# Altium PCB 基于单片机的光控计数器的设计.PcbDoc
Units mil, origin at the board's own origin, x right, y up, seen from the top; angles counter-clockwise.
Board outline 6000 x 4000 mil, 2 copper layers (Top Layer, Bottom Layer); 26 components, 28 nets, 134 pads, 0 vias.
Unrouted connection lines stored in the file: 71.
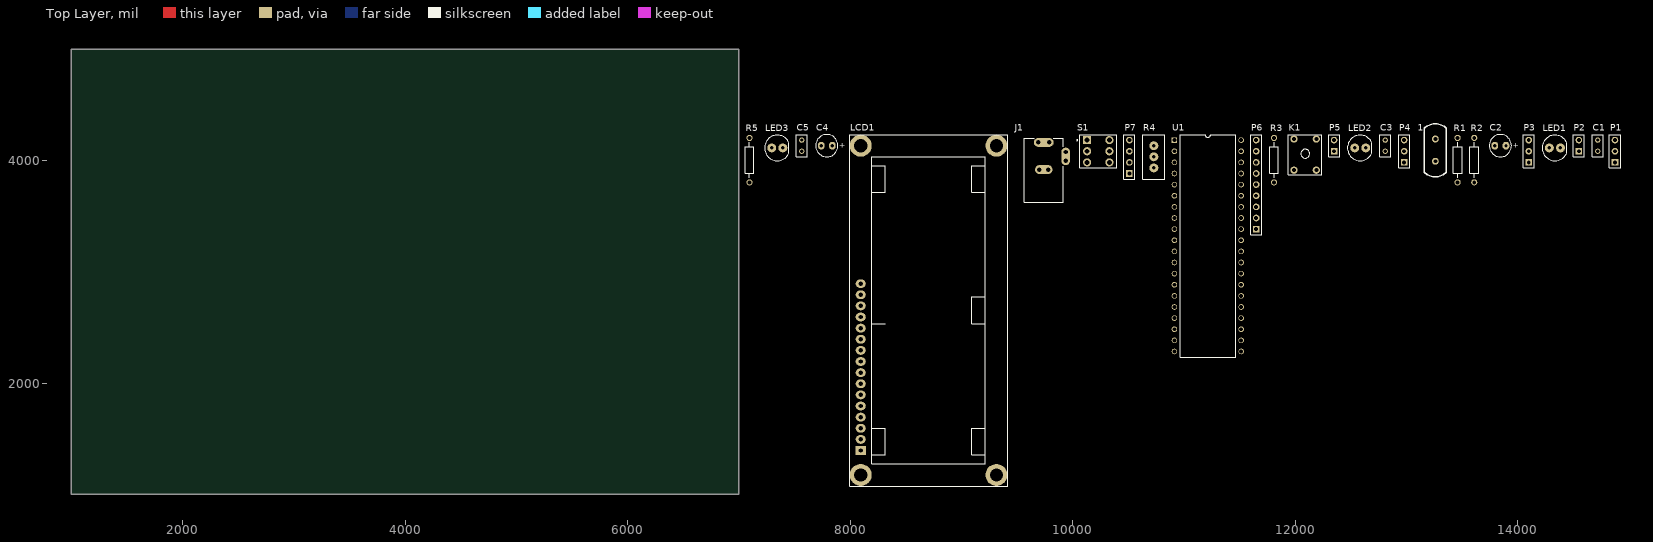
[diagram p0: Top Layer view]
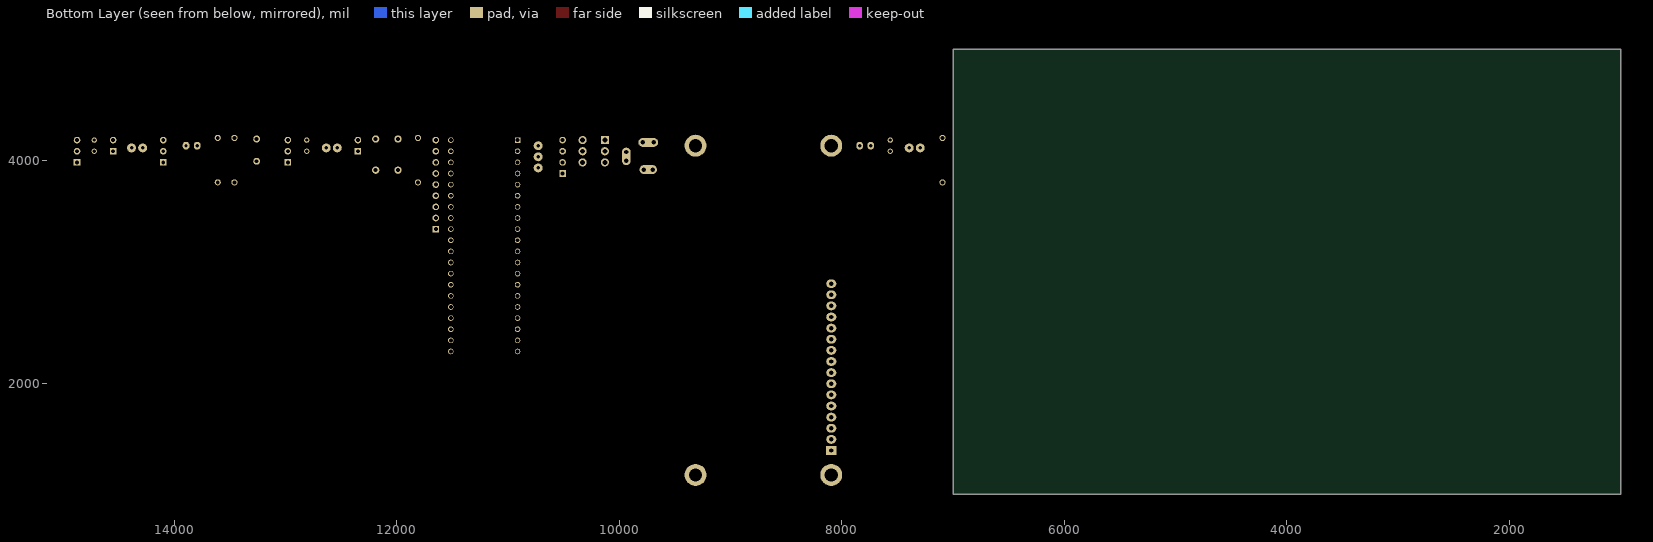
[diagram p1: Bottom Layer view, seen from below]

## Layer stack, top to bottom
Top Layer: signal copper 1.4
Dielectric: dielectric 12.6, FR-4, Dk 4.8
Bottom Layer: signal copper 1.4

## Board outline
1000,1000 7000,1000 7000,5000 1000,5000

## Design rules (kind name [scope] priority, off if disabled: settings)
Clearance [All] p1: gap=10
PolygonConnect [All] p1: connectstyle=Relief reliefconductorwidth=10 reliefentries=4 polygonreliefangle="90 Angle" airgapwidth=10
RoutingVias [All] p1: holewidth=28 width=50 viastyle="Through Hole" minholewidth=28 minwidth=50 maxholewidth=28 maxwidth=50
SolderMaskExpansion [All] p1: expansion=4
Width [All] p1: maxlimit=10 minlimit=10 preferedwidth=10
28 further rules are at their usual default settings.

## Components (designator, comment, footprint, x,y, rotation, side; value= is the part's Value field where it differs from the comment)
1 "XTAL" XTAL 13260,4095 r90 top
C1 "Cap" RAD-0.1 14720,4135 r90 top
C2 "Cap Pol1" RB.1/.2 13845,4135 r0 top
C3 "Cap" RAD-0.1 12810,4135 r90 top
C4 "Cap Pol1" RB.1/.2 7790,4135 r0 top
C5 "Cap" RAD-0.1 7565,4135 r90 top
J1 "PWR2.5" KLD-0202 9740,3625 r90 top
K1 "四脚按键" 四脚按键 11990,4195 r0 top
LCD1 "LCD1602" LCD1602 8095,1395 r90 top
LED1 "LED" LED 14285,4115 r0 top
LED2 "LED" LED 12535,4115 r0 top
LED3 "LED" LED 7295,4115 r0 top
P1 "接收管1" HDR1X3 14875,3985 r90 top
P2 "发射管1" HDR1X2 14550,4085 r90 top
P3 "蜂鸣器" HDR1X3 14100,3985 r90 top
P4 "接收管2" HDR1X3 12980,3985 r90 top
P5 "发射管2" HDR1X2 12350,4085 r90 top
P6 "排阻" HDR1X9 11650,3385 r90 top
P7 "Header 4" HDR1X4 10510,3885 r90 top
R1 "Res2" AXIAL-0.4 13460,4005 r90 top
R2 "Res2" AXIAL-0.4 13610,4005 r90 top
R3 "Res2" AXIAL-0.4 11810,4005 r90 top
R4 "Res Tap" 电位器 10730,3935 r90 top
R5 "Res2" AXIAL-0.4 7095,4005 r90 top
S1 "SW-DPDT" SWITCH_B1 10230,4085 r0 top
U1 "STC89C52" DIP-40 10915,4185 r0 top

## Footprints (in the part's own frame and the unit in brackets; to place one, negate y for a bottom-side part, rotate by r counter-clockwise, add the part's x,y. Pads: shape width x height; smd on the part's side, far side on the other; paste and mask are expansions set on the pad)
AXIAL-0.4 [mm] "Axial Device, Thru-Hole; 2 Leads; 0.4 in Pin Spacing"
  round 1.4 hole 0.85: 1(-5.08,0) 2(5.08,0)
  silkscreen extent -4.06,-1.02 4.06,1.02
DIP-40 [mm]
  rect 1.27x1.27 hole 0.9: 1(0,0)
  round 1.27 hole 0.9: 2(0,-2.54) 3(0,-5.08) 4(0,-7.62) 5(0,-10.16) 6(0,-12.7) 7(0,-15.24) 8(0,-17.78) 9(0,-20.32) 10(0,-22.86) 11(0,-25.4) 12(0,-27.94) 13(0,-30.48) 14(0,-33.02) 15(0,-35.56) 16(0,-38.1) 17(0,-40.64) 18(0,-43.18) 19(0,-45.72) 20(0,-48.26) 21(15.24,-48.26) 22(15.24,-45.72) 23(15.24,-43.18) 24(15.24,-40.64) 25(15.24,-38.1) 26(15.24,-35.56) 27(15.24,-33.02) 28(15.24,-30.48) 29(15.24,-27.94) 30(15.24,-25.4) 31(15.24,-22.86) 32(15.24,-20.32) 33(15.24,-17.78) 34(15.24,-15.24) 35(15.24,-12.7) 36(15.24,-10.16) 37(15.24,-7.62) 38(15.24,-5.08) 39(15.24,-2.54) 40(15.24,0)
  silkscreen extent 1.27,-49.53 13.97,1.27
HDR1X2 [mm] "Connector; Header; 2 Position"
  rect 1.5x1.5 hole 0.9: 1(0,0)
  round 1.5 hole 0.9: 2(2.54,0)
  silkscreen extent -1.27,-1.27 3.81,1.27
HDR1X3 [mm] "Connector; Header; 3 Position"
  rect 1.5x1.5 hole 0.9: 1(0,0)
  round 1.5 hole 0.9: 2(2.54,0) 3(5.08,0)
  silkscreen extent -1.27,-1.27 6.35,1.27
HDR1X4 [mm] "Connector; Header; 4 Position"
  rect 1.5x1.5 hole 0.9: 1(0,0)
  round 1.5 hole 0.9: 2(2.54,0) 3(5.08,0) 4(7.62,0)
  silkscreen extent -1.27,-1.27 8.89,1.27
HDR1X9 [mm] "Connector; Header; 9 Position"
  rect 1.5x1.5 hole 0.9: 1(0,0)
  round 1.5 hole 0.9: 2(2.54,0) 3(5.08,0) 4(7.62,0) 5(10.16,0) 6(12.7,0) 7(15.24,0) 8(17.78,0) 9(20.32,0)
  silkscreen extent -1.27,-1.27 21.59,1.27
KLD-0202 [mm] "DC Power Jack, 2.5mm, KLD Series, PCB Mount"
  oval 2x4.5 all layers, no hole: 1(13.7,0)
  round 1.5 hole 1: 1A(13.7,-1.25) 1B(13.7,1.25) 2A(7.5,-1) 2B(7.5,1) 3A(9.5,-5) 3B(11.5,-5)
  oval 2x4 all layers, no hole: 2(7.5,0)
  oval 4x2 all layers, no hole: 3(10.5,-5)
  silkscreen extent 0,-4.5 14.6,4.5
LCD1602 [mm]
  round 5 hole 3: 0(-5.588,0) 0(-5.588,-30.988) 0(69.596,-30.988) 0(69.596,0)
  rect 2x2.3 hole 1: 1(0,0)
  oval 2x2.3 hole 1: 2(2.54,0) 3(5.08,0) 4(7.62,0) 5(10.16,0) 6(12.7,0) 7(15.24,0) 8(17.78,0) 9(20.32,0) 10(22.86,0) 11(25.4,0) 12(27.94,0) 13(30.48,0) 14(33.02,0) 15(35.56,0) 16(38.1,0)
  silkscreen extent -8.13,-33.53 72.14,2.54
LED [mil]
  round 80 hole 32: 1(0,0) 2(100,0)
  silkscreen extent -65,-115 155,115
RAD-0.1 [mm] "Radial Cap, Thru-Hole; 2 Leads; 0.1 in Pin Spacing"
  round 1.2 hole 0.7: 1(-1.27,0) 2(1.27,0)
  silkscreen extent -2.54,-1.27 2.54,1.27
RB.1/.2 [mil]
  oval 60x70 hole 30: 1(50,0) 2(-50,0)
  silkscreen extent -100,-100 100,100
SWITCH_B1 [mm] "单刀"
  rect 1.85x1.85 hole 1.1: 1(-2.54,2.54)
  round 1.85 hole 1.1: 2(-2.54,0) 3(-2.54,-2.54) 4(2.54,-2.54) 5(2.54,0) 6(2.54,2.54)
  silkscreen extent -4.96,-3.81 4.28,3.81
XTAL [mil]
  round 62 hole 35.43: 1(-100,0) 2(100,0)
  silkscreen extent -240,-100 238,100
四脚按键 [mm]
  round 1.652 hole 0.9: 1(0,0) 2(5.08,0) 3(0,-7.112) 4(5.08,-7.112)
  silkscreen extent -1.27,-8.13 6.35,1.02
电位器 [mil]
  round 80 hole 32: 1(0,0) 2(100,0) 3(200,0)
  silkscreen extent -100,-100 300,100

## Part data
1: "Crystal Oscillator"
C1 C3 C5: "Capacitor"
C2 C4: "Polarized Capacitor (Radial)"
J1: "Low Voltage Power Supply Connector"
P1 P3 P4: library part "Header 3", "Header, 3-Pin"
P2 P5: library part "Header 2", "Header, 2-Pin"
P6: library part "Header 9", "Header, 9-Pin"
P7: "Header, 4-Pin"
R1 R2 R3 R5: "Resistor"
R4: "Tapped Resistor"
S1: "单刀双掷开关"
U1: library part STC89C51

## Nets (pads, with @x,y where several pads share a name; then routed paths per layer and width w, separated by ;. In a path a pad name is that pad's centre, name@x,y a point inside that pad or via, vN(x,y) a via of type N, cw(c..) or ccw(c..) an arc to the next point about the centre after c; other vN are vias at no path point)
5V: J1.1 J1.1A J1.1B S1.2
BEEP: P3.2 U1.4
D0: LCD1.7 P6.2 U1.39
D1: LCD1.8 P6.3 U1.38
D2: LCD1.9 P6.4 U1.37
D3: LCD1.10 P6.5 U1.36
D4: LCD1.11 P6.6 U1.35
D5: LCD1.12 P6.7 U1.34
D6: LCD1.13 P6.8 U1.33
D7: LCD1.14 P6.9 U1.32
E: LCD1.6 U1.3
GND: C1.2 C3.2 C4.2 C5.1 J1.2 J1.2A J1.2B LCD1.1 LCD1.16 P1.3 P2.1 P3.1 P4.3 P5.1 P7.1 R1.1 R4.2 R4.3 R5.2 U1.20
NetC2_2: C2.2 R1.2
NetJ1_3: J1.3 J1.3A J1.3B
NetLED1_2: LED1.2 R2.2
NetLED2_2: LED2.2 R3.2
NetLED3_2: LED3.2 R5.1
OUT1: P1.2 R2.1 U1.28
OUT2: P4.2 R3.1 U1.27
RESET: K1.2 U1.9
RS: LCD1.4 U1.1
RW: LCD1.5 U1.2
RX: P7.3 U1.10
TX: P7.2 U1.11
VCC: C2.1 C4.1 C5.2 K1.1 LCD1.2 LCD1.15 LED1.1 LED2.1 LED3.1 P1.1 P2.2 P3.3 P4.1 P5.2 P6.1 P7.4 S1.3 U1.40
VO: LCD1.3 R4.1
XTAL1: 1.1 C3.1 U1.19
XTAL2: 1.2 C1.1 U1.18
pads on no net: K1.3 K1.4 LCD1.0 S1.1 S1.4 S1.5 S1.6 U1.5 U1.6 U1.7 U1.8 U1.12 U1.13 U1.14 U1.15 U1.16 U1.17 U1.21 U1.22 U1.23 U1.24 U1.25 U1.26 U1.29 U1.30 U1.31

## Text inside footprints (layer, text, board x,y; h text height)
C2: Top Overlay "+" at 13955,4115 h48
C4: Top Overlay "+" at 7900,4115 h48
J1: Mechanical 1 "Mech 2 - Clearance, move to internal plane if present" at 9540.56,3636.26 h11.81 r90; Mechanical 1 "Mech 1 - Slot cut-out" at 9520.87,3636.26 h11.81 r90; Mechanical 1 "Assign keep-out area to slot" at 9481.5,3636.26 h11.81 r90; Mechanical 1 "Alert PCB fab to slot details" at 9501.18,3636.26 h11.81 r90